# EAGLE board main (EAGLE 9.2.2)
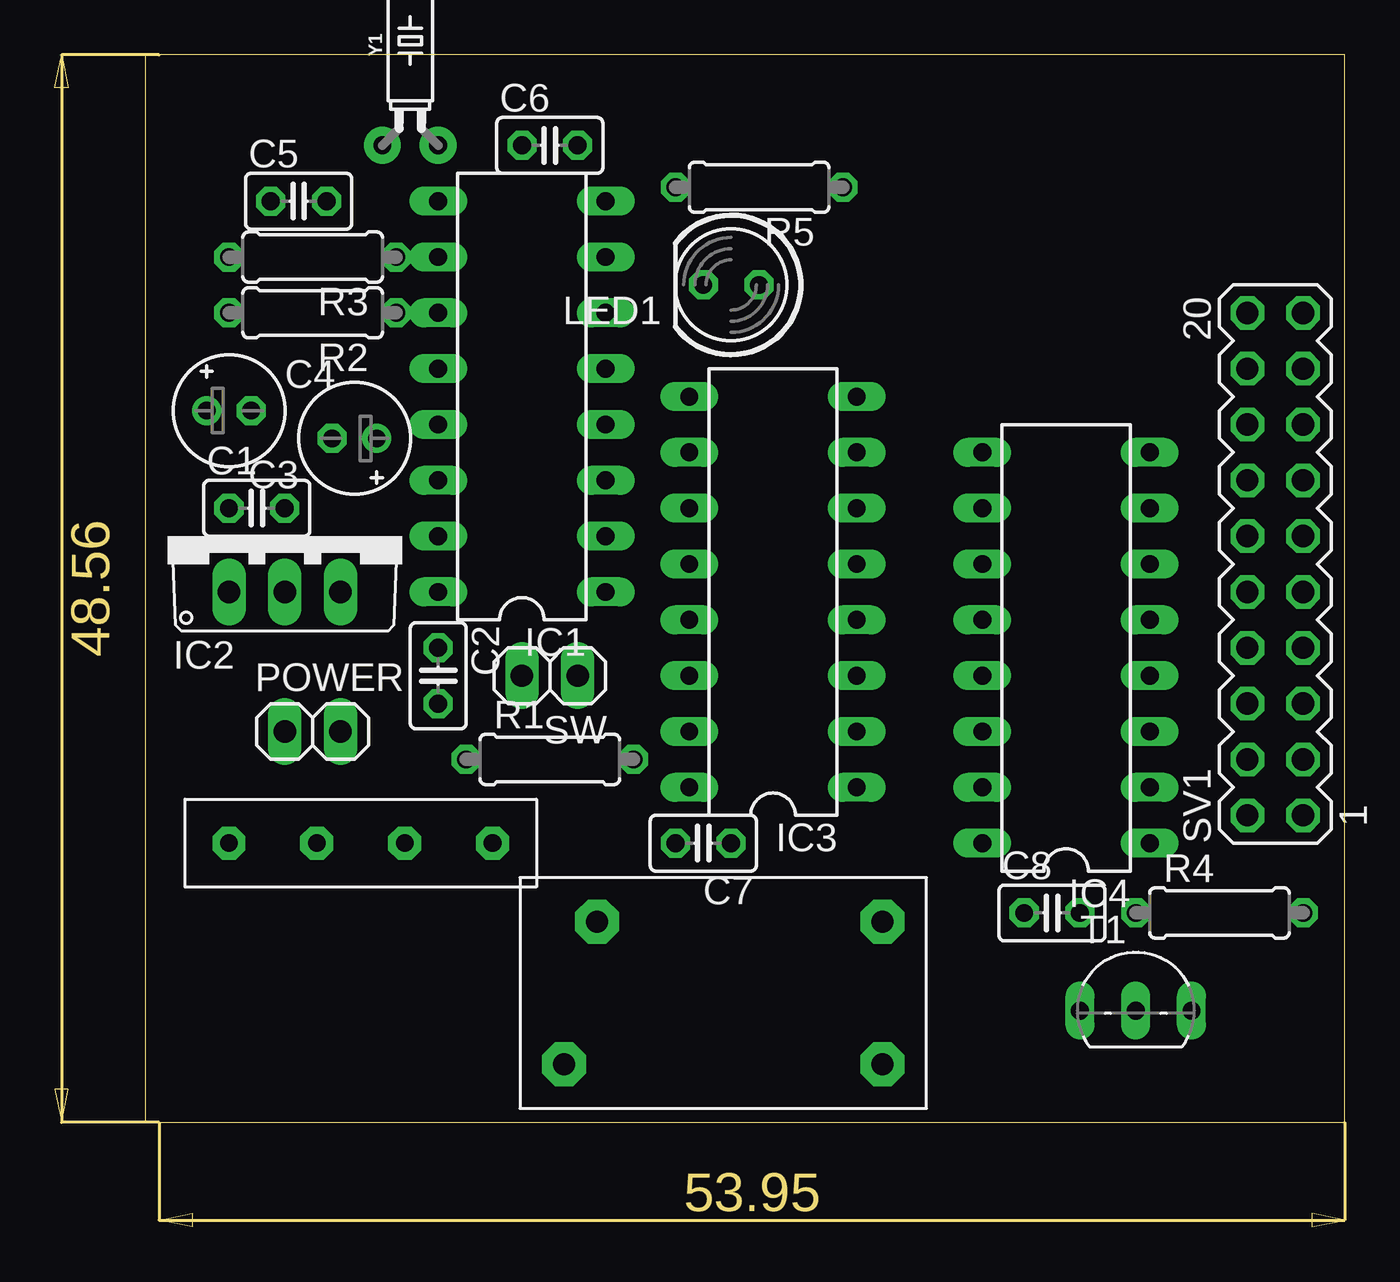
[diagram p0: board, top side]
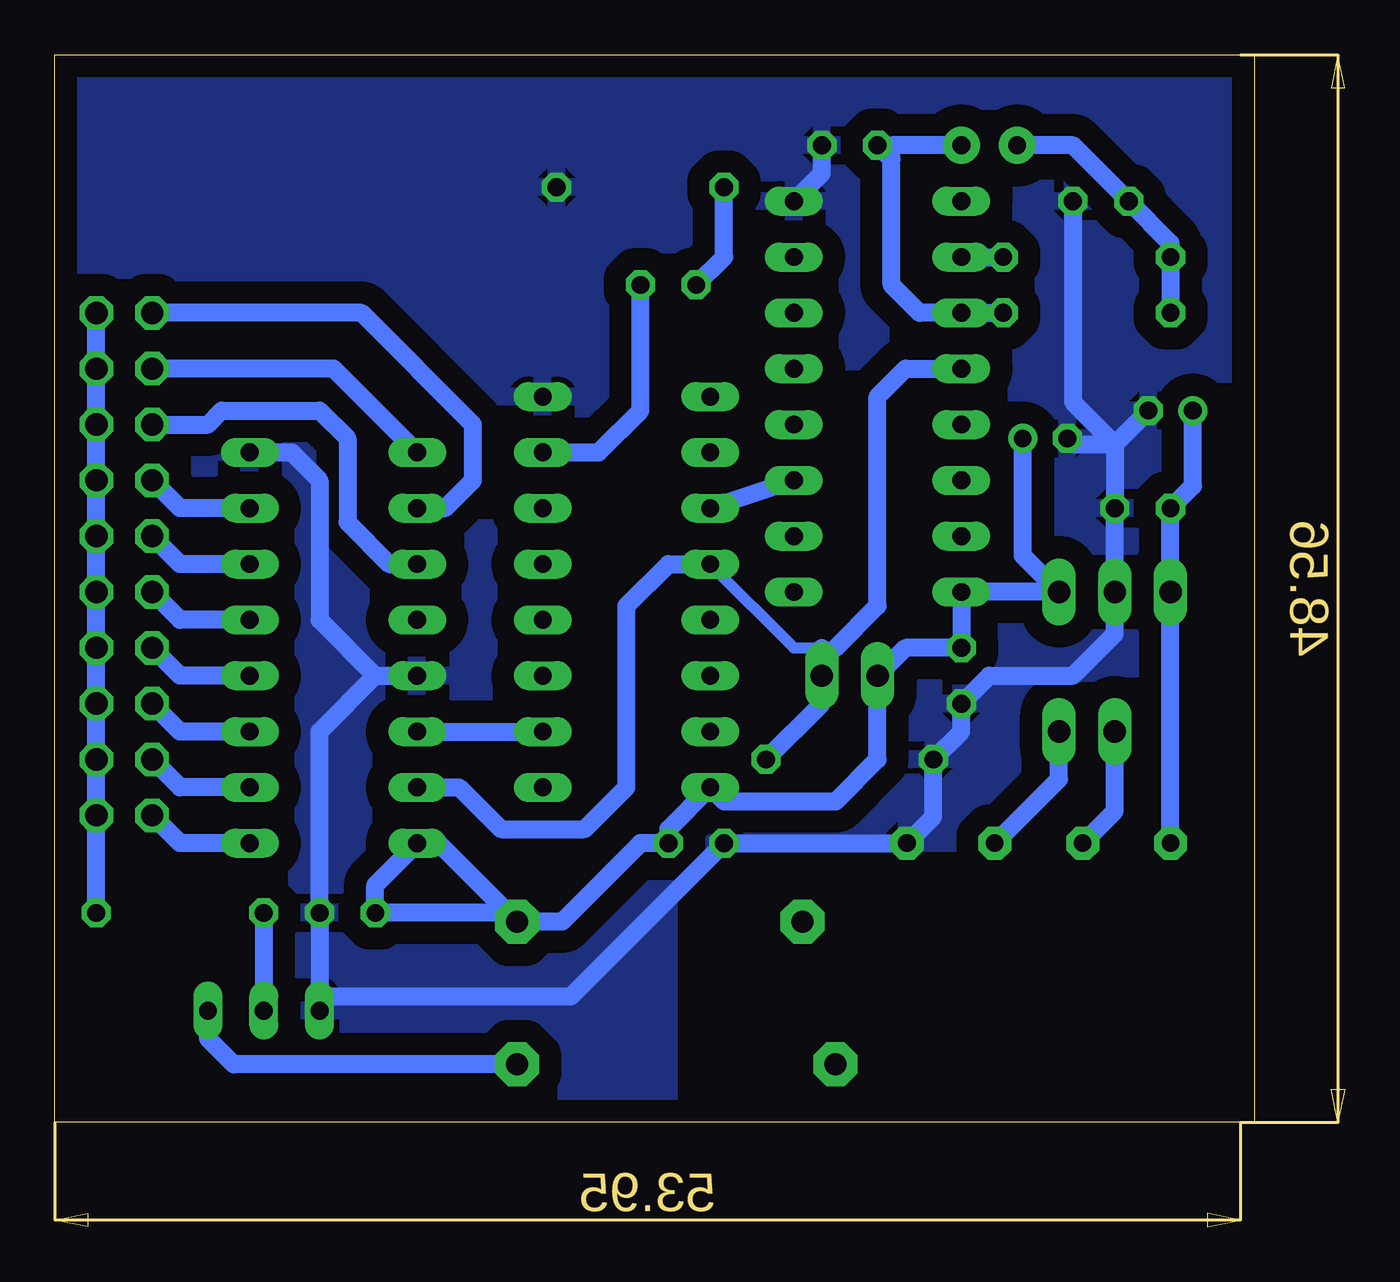
[diagram p1: board, bottom side, seen from below]

Size 54.59 x 48.56 mm. Coordinates in mm from the lower left corner, seen from the top.
Outline: 0,0 54.59,0 54.59,48.56 0,48.56 0,0
Copper layers (1*16): Top 0.035mm / dielectric 1.5mm / Bottom 0.035mm
Design rules "default": minimum track width 6mil, minimum drill 0.35mm, track to track 6mil, track to pad 6mil, pad to pad 6mil, via to via 6mil, smd to smd 6mil, copper to edge 40mil, drill to drill 6mil, minimum pad ring 10mil, minimum via ring 8mil, stop-mask expansion 4mil, vias tented up to drill 0mil, thermal gap 10mil

## Footprints (pad centres in the part's own frame; a part is rotated, then mirrored left to right if it is on the bottom)
C025-025X050 = drill 0.813 octagon: 1 -1.27,0; 2 1.27,0
E2-5 = drill 0.813 pad 1.27: + -1.016,0 | drill 0.813 pad 1.27 octagon: - 1.016,0
DIL16 = drill 0.813 long: 1 -8.89,-3.81; 2 -6.35,-3.81; 3 -3.81,-3.81; 4 -1.27,-3.81; 5 1.27,-3.81; 6 3.81,-3.81; 7 6.35,-3.81; 8 8.89,-3.81; 9 8.89,3.81; 10 6.35,3.81; 11 3.81,3.81; 12 1.27,3.81; 13 -1.27,3.81; 14 -3.81,3.81; 15 -6.35,3.81; 16 -8.89,3.81
TO220V = drill 1.016 long: 1 -2.54,-2.54; 2 0,-2.54; 3 2.54,-2.54
LED5MM = drill 0.813 octagon: A -1.27,0; K 1.27,0
1X02 = drill 1.016 long: 1 -1.27,0; 2 1.27,0
0207/7 = drill 0.813 octagon: 1 -3.81,0; 2 3.81,0
MA10-2 = drill 1.016 octagon: 1 -11.43,-1.27; 2 -11.43,1.27; 3 -8.89,-1.27; 4 -8.89,1.27; 5 -6.35,-1.27; 6 -6.35,1.27; 7 -3.81,-1.27; 8 -3.81,1.27; 9 -1.27,-1.27; 10 -1.27,1.27; 11 1.27,-1.27; 12 1.27,1.27; 13 3.81,-1.27; 14 3.81,1.27; 15 6.35,-1.27; 16 6.35,1.27; 17 8.89,-1.27; 18 8.89,1.27; 19 11.43,-1.27; 20 11.43,1.27
TO92-EBC-OVAL = drill 0.813 long: B 0,-1.27; C 2.54,-1.27; E -2.54,-1.27
KBP205G = drill 0.8 pad 1.5 octagon: + 0,0; - 12,0; AC@1 4,0; AC@2 8,0
835-1A_RELAY_12V = drill 1 pad 2 octagon: P$1 8.5,2; P$2 2,2; P$3 8.5,15; P$4 2,16.5
CRYSTAL-PTH-2X6-CYL = drill 0.813 pad 1.676: 1 -1.27,0; 2 1.27,0

## Placement (x,y rotation side)
C1  100u  [C025-025X050]  5.08,27.94 0 top
C2  100n  [C025-025X050]  13.34,20.32 270 top
C3  100u  [E2-5]  9.53,31.12 180 top
C4  100n  [E2-5]  3.81,32.38 0 top
C5  33p  [C025-025X050]  6.99,41.91 0 top
C6  33p  [C025-025X050]  18.41,44.45 0 top
C7  100n  [C025-025X050]  25.4,12.7 180 top
C8  100n  [C025-025X050]  41.27,9.53 0 top
IC1  4060N  [DIL16]  17.14,33.02 90 top
IC2  7812TV  [TO220V]  6.35,26.67 0 top
IC3  4060N  [DIL16]  28.57,24.13 90 top
IC4  4017N  [DIL16]  41.91,21.59 90 top
LED1  [LED5MM]  26.67,38.1 180 top
POWER  [1X02]  7.62,17.78 0 top
R1  22k  [0207/7]  18.41,16.51 0 top
R2  10M  [0207/7]  7.62,36.83 180 top
R3  330k  [0207/7]  7.62,39.37 180 top
R4  [0207/7]  48.89,9.53 0 top
R5  500  [0207/7]  27.94,42.55 180 top
SV1  [MA10-2]  51.43,25.4 90 top
SW  [1X02]  18.41,20.32 180 top
T1  2N2222  [TO92-EBC-OVAL]  45.08,6.35 0 top
U$2  KBP205GK  [KBP205G]  3.81,12.7 0 top
U$3  835-1A_RELAY12V  [835-1A_RELAY_12V]  35.56,0.64 90 top
Y1  32.768kHz  [CRYSTAL-PTH-2X6-CYL]  12.07,44.45 0 top

## Library data of the parts
C1-C8 = rcl; SPICEPREFIX: C
IC1 IC3 IC4 = 40xx
IC2 = linear
LED1 = led
POWER SW = pinhead
R1-R5 = rcl; SPICEPREFIX: R
SV1 = con-lstb; OC_FARNELL: unknown; OC_NEWARK: unknown
T1 = adafruit
U$2 U$3 = 7_segment_lib
Y1 = SparkFun-Clocks; PROD_ID: XTAL-10112

## Nets
12V: C2.1 C3.+ C7.1 C8.1 IC1.16 IC2.3 IC3.16 IC4.16 SW.2 U$3.P$1
GND: C1.2 C2.2 C3.- C4.- C5.2 C6.2 C7.2 C8.2 IC1.8 IC2.2 IC3.8 IC4.8 IC4.13 R1.1 R5.1 T1.E U$2.-
N$1: POWER.2 U$2.AC@2
N$2: POWER.1 U$2.AC@1
N$3: IC1.12 IC3.12 IC4.15 R1.2 SW.1
N$4: IC1.10 R3.1
N$5: C6.1 IC1.11 R2.1 Y1.2
N$6: IC1.3 IC3.11
N$7: C5.1 R2.2 R3.2 Y1.1
N$8: IC3.2 IC4.14
N$9: IC4.11 SV1.16
N$10: IC4.9 SV1.18
N$11: IC4.6 SV1.12
N$12: IC4.5 SV1.10
N$13: IC4.1 SV1.2
N$14: IC4.10 SV1.20
N$15: IC4.7 SV1.14
N$16: IC4.4 SV1.8
N$17: IC4.2 SV1.4
N$18: IC4.3 SV1.6
N$19: R4.2 SV1.1 SV1.3 SV1.5 SV1.7 SV1.9 SV1.11 SV1.13 SV1.15 SV1.17 SV1.19
N$20: R4.1 T1.B
N$21: T1.C U$3.P$2
N$22: LED1.K R5.2
N$23: IC3.7 LED1.A
VDD: C1.1 C4.+ IC2.1 U$2.+

## Tracks (layer width: path | path; a pad name or v marks a point on that pad's centre or on a via)
12V
  Bottom 0.813: U$3.P$1 31.5,9.13 27.94,12.7 C7.1 26.67,13.34 IC3.16 24.13,14.61 19.05,14.61 17.14,16.51 SW.2 15.88,21.59 C2.1 IC1.16 IC2.3 10.54,25.78 C3.+ | U$3.P$1 37.12,12.7 IC4.16 40,10.79 C8.1 33.95,9.53 U$3.P$1
GND
  Bottom 0.813: IC4.8 43.81,30.48 42.54,29.21 42.54,22.86 40,20.32 | 40,20.32 IC4.13 | 40,20.32 42.54,17.78 C8.2 42.54,5.71 | 42.54,5.71 T1.E | IC1.8 19.68,43.18 C6.2 | C4.- 6.35,30.86 | 6.35,30.86 C1.2 IC2.2 6.35,22.22 8.26,20.32 12.07,20.32 C2.2 13.34,17.78 R1.1 14.61,13.91 U$2.- C7.2 31.11,5.71 42.54,5.71 | C3.- 8.26,30.86 6.35,30.86 | C5.2 8.26,32.77 6.35,30.86
  pour Bottom (isolate 1.016): -0.64,12.7 26.67,12.7 26.67,0 53.97,0 53.97,48.89 -0.64,48.89
N$1
  Bottom 0.813: POWER.2 8.89,15.62 U$2.AC@2
N$2
  Bottom 0.813: POWER.1 6.35,14.16 U$2.AC@1
N$3
  Bottom 0.508: 19.05,21.59 19.68,21.59 20.32,21.59 20.96,21.59 IC3.12
  Bottom 0.813: 19.68,21.59 SW.1 19.68,19.05 R1.2 | 19.05,21.59 17.14,23.49 17.14,33.02 15.88,34.29 IC1.12 | IC4.15 36.2,15.24 34.29,13.34 30.48,13.34 28.57,15.24 28.57,23.49 26.67,25.4 IC3.12
N$4
  Bottom 0.813: IC1.10 R3.1
N$5
  Bottom 0.813: R2.1 IC1.11 15.24,36.83 16.51,38.1 16.51,43.81 | 16.51,43.81 16.51,44.45 Y1.2 | 16.51,43.81 C6.1
N$6
  Bottom 0.813: IC1.3 IC3.11
N$7
  Bottom 0.813: R2.2 R3.2 3.81,40 C5.1 8.26,44.45 Y1.1
N$8
  Bottom 0.813: IC4.14 IC3.2
N$9
  Bottom 0.813: SV1.16 47.62,31.75 46.99,32.38 42.54,32.38 41.27,31.12 41.27,27.3 39.37,25.4 IC4.11
N$10
  Bottom 0.813: IC4.9 41.91,34.29 SV1.18
N$11
  Bottom 0.813: IC4.6 48.89,25.4 SV1.12
N$12
  Bottom 0.813: IC4.5 48.89,22.86 SV1.10
N$13
  Bottom 0.813: IC4.1 48.89,12.7 SV1.2
N$14
  Bottom 0.813: SV1.20 40.64,36.83 35.56,31.75 35.56,29.21 36.83,27.94 IC4.10
N$15
  Bottom 0.813: IC4.7 48.89,27.94 SV1.14
N$16
  Bottom 0.813: IC4.4 48.89,20.32 SV1.8
N$17
  Bottom 0.813: IC4.2 48.89,15.24 SV1.4
N$18
  Bottom 0.813: IC4.3 48.89,17.78 SV1.6
N$19
  Bottom 0.813: SV1.19 SV1.17 SV1.15 SV1.13 SV1.11 SV1.9 SV1.7 SV1.5 SV1.3 SV1.1 R4.2
N$20
  Bottom 0.813: R4.1 T1.B
N$21
  Bottom 0.813: U$3.P$2 46.45,2.63 47.62,3.81 T1.C
N$22
  Bottom 0.813: LED1.K 24.13,39.37 R5.2
N$23
  Bottom 0.813: IC3.7 29.84,30.48 27.94,32.38 LED1.A
VDD
  Bottom 0.813: C4.+ 2.79,28.96 C1.1 IC2.1 U$2.+